# Altium PCB PCB1.PcbDoc
Units mil, origin at the board's own origin, x right, y up, seen from the top; angles counter-clockwise.
Board outline 6000 x 4000 mil, 2 copper layers (Top Layer, Bottom Layer); 35 components, 52 nets, 199 pads, 0 vias.
Unrouted connection lines stored in the file: 91.
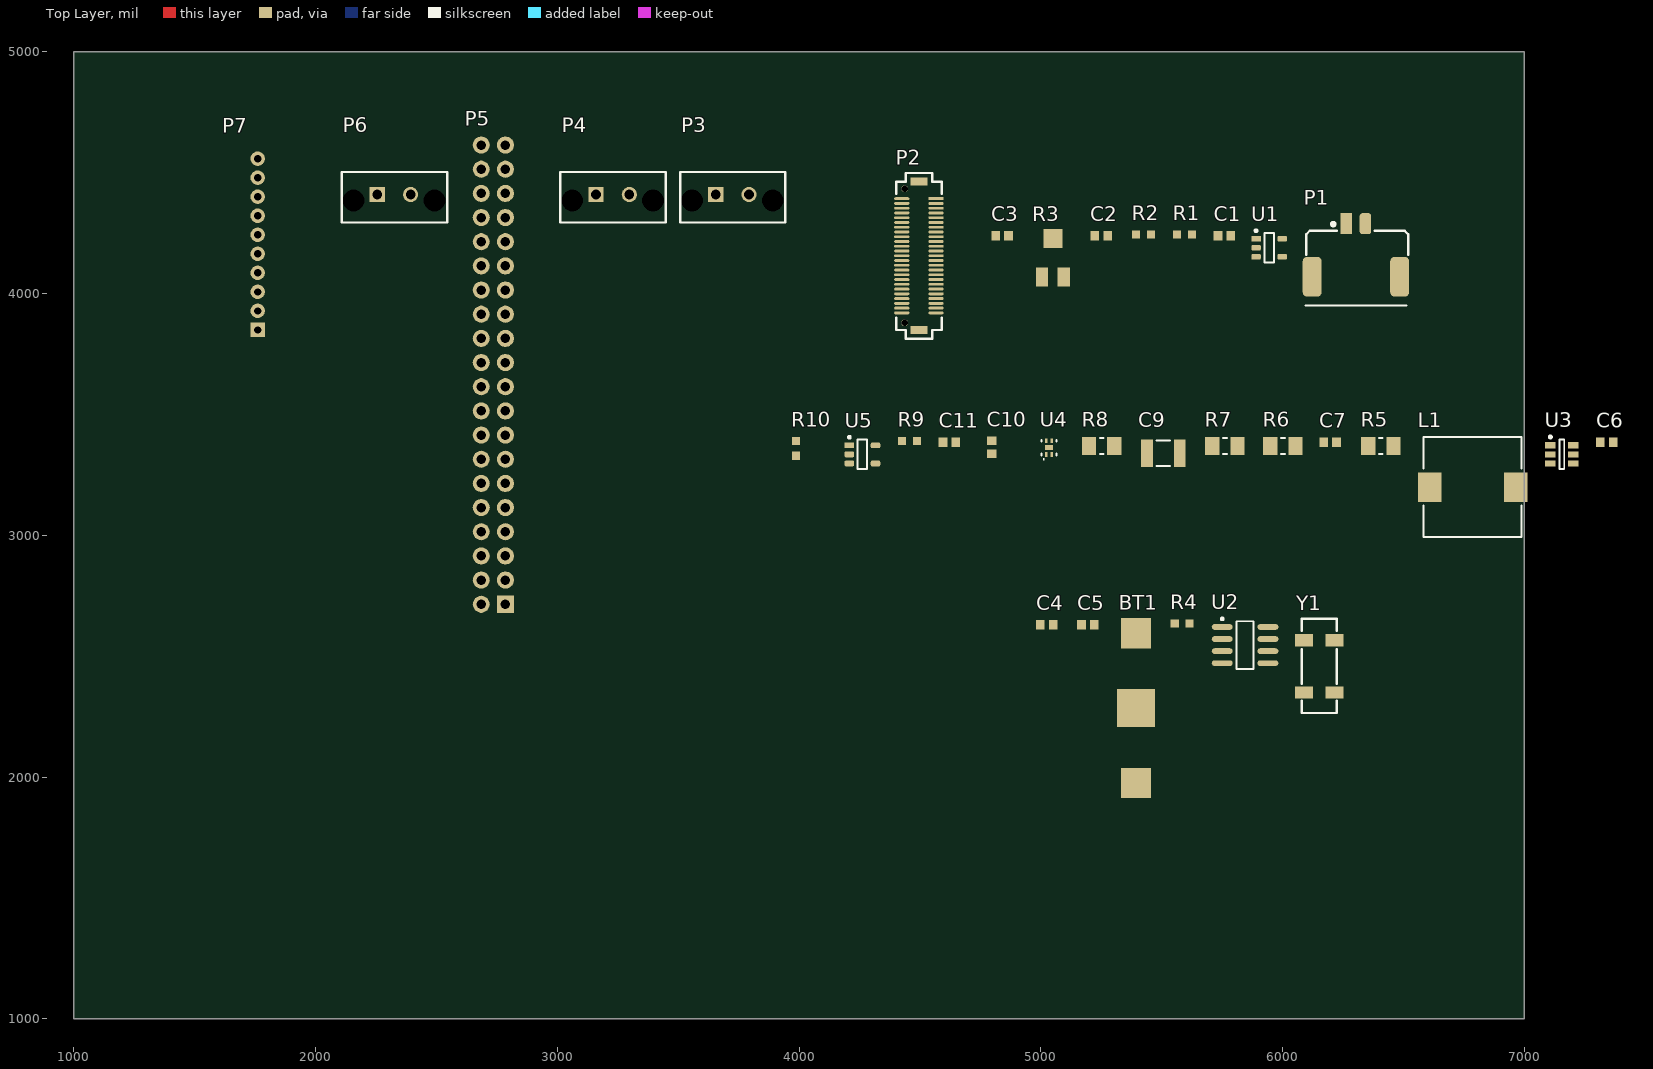
[diagram p0: Top Layer view]
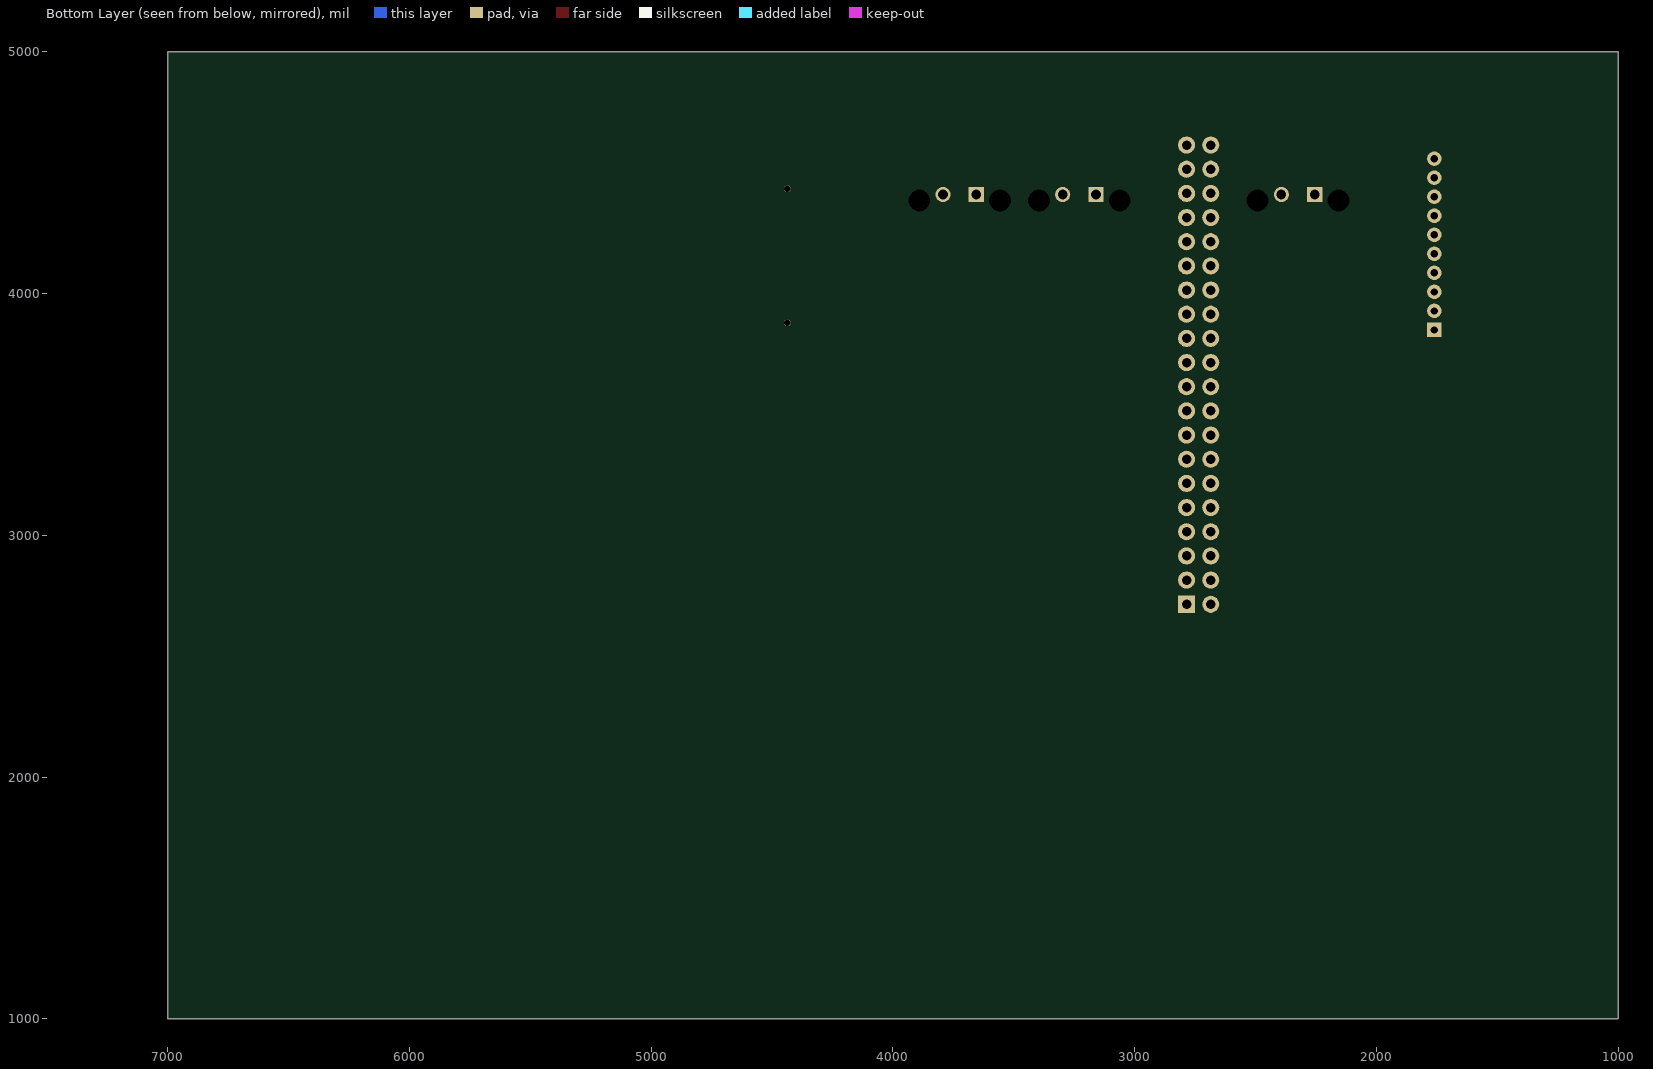
[diagram p1: Bottom Layer view, seen from below]

## Layer stack, top to bottom
Top Solder: solder mask 0.4, Solder Resist, Dk 3.5
Top Layer: signal copper 1.4
Dielectric 1: dielectric 12.6, FR-4, Dk 4.8
Bottom Layer: signal copper 1.4
Bottom Solder: solder mask 0.4, Solder Resist, Dk 3.5

## Board outline
1000,1000 7000,1000 7000,5000 1000,5000

## Design rules (kind name [scope] priority, off if disabled: settings)
Clearance [All] p1: gap=10 ignorepadtopadclearanceinfootprint=FALSE except(0: Arc-Hole Track-Hole SMDPad-Hole THPad-Hole Via-Hole Fill-Hole Poly-Hole Region-Hole Text-Hole)
PolygonConnect [All] p1: connectstyle=Relief reliefconductorwidth=10 reliefentries=4 polygonreliefangle="90 Angle" airgapwidth=10
RoomDefinition "Voltage Regulator" [InComponentClass('Voltage Regulator')] p1: confinementstyle=ConfineIn formatcopy=TRUE lockcomponents=FALSE outline 3952.09,2975 7417.09,2975 7417.09,3525 3952.09,3525
RoomDefinition "Raspberry pi connectors" [InComponentClass('Raspberry pi connectors')] p2: confinementstyle=ConfineIn formatcopy=TRUE lockcomponents=FALSE outline 1360,2600 3955,2600 3955,4870 1360,4870
RoomDefinition "Controller Board Interface" [InComponentClass('Controller Board Interface')] p3: confinementstyle=ConfineIn formatcopy=TRUE lockcomponents=FALSE outline 4365,3780 4595,3780 4595,4590 4365,4590
RoutingVias [All] p1: holewidth=28 width=50 viastyle="Through Hole" minholewidth=28 minwidth=50 maxholewidth=28 maxwidth=50
SolderMaskExpansion [All] p1: expansion=4
Width [All] p1: maxlimit=10 minlimit=10 preferedwidth=10
30 further rules are at their usual default settings.

## Classes and differential pairs
component class "Voltage Regulator": C6 C7 C8 C9 C10 C11 L1 R5 R6 R7 R8 R9 R10 U3 U4 U5
component class RTC: BT1 C4 C5 R4 U2 Y1
component class "Raspberry pi connectors": P3 P4 P5 P6 P7
component class "Controller Board Interface": P2
component class "Ambient Light Sensor": C1 C2 C3 P1 R1 R2 R3 U1

## Components (designator, comment, footprint, x,y, rotation, side; value= is the part's Value field where it differs from the comment)
BT1 "HOLDER COIN CELL FOR CR1220 SMD" "HOLDER BUTTON BATTERY 3V" 3845,3525 r90 top
C1 "CAP CER 1UF 50V 10% X7R 0603" "CAP, 0603" 5760,4240 r0 top
C2 "CAP CER 100PF 50V C0G/NP0 0603" "CAP, 0603" 5250,4240 r0 top
C3 "CAP CER 100PF 50V C0G/NP0 0603" "CAP, 0603" 4840,4240 r0 top
C4 "CAP CER 2.2UF 25V 10% X5R 0603" "CAP, 0603" 5025,2630 r0 top
C5 "CAP CER 1UF 50V 10% X7R 0603" "CAP, 0603" 5195,2630 r0 top
C6 "CAP CER 0.1UF 50V 10% X7R 0603" "CAP, 0603" 7342.09,3385 r0 top
C7 "CAP CER 680PF 25V C0G 0201" "CAP, 0603" 6197.09,3385 r0 top
C9 "CAP CER 22UF 16V ±20% X5R 1210" "CAP, 1210" 5507.09,3340 r0 top
C10 "CAP CER 1UF 50V 10% X7R 0603" "CAP, 0603" 4797.09,3365 r90 top
C11 "CAP CER 1UF 50V 10% X7R 0603" "CAP, 0603" 4622.09,3385 r0 top
L1 "IND 10UH 2.8A 59 MOHM SMD" "IND P100102X31N" 6787.09,3200 r0 top
P1 "Dura-Clik" "CONN, 2POS Dura-Click Vertical" 6264.53,4289.69 r0 top
P2 "CONN 50POS Bergstak Plug 0.02\"" "CONN, Bergstak 50 Pos Plug" 4495.87,4156.89 r0 top
P3 "CONN 2POS ULTRA-FIT 0.138\"" "CONN, 2POS ULTRA-FIT" 3655,4410 r0 top
P4 "CONN 2POS ULTRA-FIT NATURAL COLOR 0.138\"" "CONN, 2POS ULTRA-FIT - NATURAL COLOR" 3160,4410 r0 top
P5 "CONN 40POS RECEPTACLE 2.54 mm" "CONN 40POS RECEPTACLE 2.54 MM" 2785,2715 r90 top
P6 "CONN 2POS ULTRA-FIT NATURAL COLOR 0.138\"" "CONN, 2POS ULTRA-FIT - NATURAL COLOR" 2255,4410 r0 top
P7 "CONN 10POS HEADER PH SIDE 2MM" "CONN 10 POS" 1760,3850 r90 top
R1 "RES 120 OHM 1% 1/10W 0603" "RES, 0603" 5595,4245 r0 top
R2 "RES 4.7K OHM 1% 1/10W 0603" "RES, 0603" 5425,4245 r0 top
R3 "POT 100K OHM 0.25W SMD" "POT TRIMMER 100K SMD" 5005,4070 r0 top
R4 "1K" "RES, 0603" 5585,2635 r0 top
R5 "RES 499K OHM 1% 1/4W 1206" "RES 1206" 6407.09,3370 r0 top
R6 "ES 100K OHM 1% 1/4W 1206" "RES 1206" 6002.09,3370 r0 top
R7 "RES 2.49 OHM 1% 1/4W 1206" "RES 1206" 5762.09,3370 r0 top
R8 "RES 13.7K OHM 1% 1/4W 1206" "RES 1206" 5252.09,3370 r0 top
R9 "RES 10K OHM 1% 1/10W 0603" "RES, 0603" 4457.09,3390 r0 top
R10 "RES 10K OHM 1% 1/10W 0603" "RES, 0603" 3987.09,3360 r90 top
U1 "IC OP AMP GEN PURPOSE RR 10MHZ SOT-23-5" "IC OP AMP GP RR 10MHZ SOT-23-5" 5945,4190 r0 top
U2 "IC RTC CLK/CALENDAR I2C 8-SOIC" SOIC8 5845,2545 r0 top
U3 "IC REG BUCK ADJ 2A SYNC 6SOT" SOT23-6 7157.09,3335 r0 top
U4 "IC REG LDO 3V 0.2A 4-TDFN" "IC REG LDO 3V 0.2A 4-TDFN" 5022.09,3335 r0 top
U5 "IC OP AMP GEN PURPOSE RR 10MHZ SOT-23-5" "IC OP AMP GP RR 10MHZ SOT-23-5" 4262.09,3335 r0 top
Y1 "CRYSTAL 32.7680KHZ 12.5PF SMD" 4-SOJ 6215,2350 r90 top

## Footprints (in the part's own frame and the unit in brackets; to place one, negate y for a bottom-side part, rotate by r counter-clockwise, add the part's x,y. Pads: shape width x height; smd on the part's side, far side on the other; paste and mask are expansions set on the pad)
4-SOJ [mm]
  rect 1.3x1.9 smd: 1(0,0) 2(5.5,0) 3(5.5,3.2) 4(0,3.2)
  silkscreen extent -2.16,-0.25 7.75,3.43
"CAP, 0603" [mm] "Chip Capacitor, 2-Leads, Body 1.60x0.81mm, IPC Medium Density"
  rect 0.9x1 smd mask+0.076: 1(-0.675,0) 2(0.675,0)
  body extent -0.87,-0.48 0.87,0.48, height 0.9
"CAP, 1210" [mm] "Chip Capacitor, 2-Leads, Body 3.20x2.50mm, IPC Low Density"
  rect 1.25x2.9 smd: 1(-1.725,0) 2(1.725,0)
  silkscreen extent -0.7,-1.35 0.7,1.35, body extent -1.8,-1.4 1.8,1.4, height 2.8
"CONN 10 POS" [mil]
  rect 60x60 hole 30: 1(0,0)
  round 60 hole 30: 2(78.74,0) 3(157.48,0) 4(236.22,0) 5(314.96,0) 6(393.7,0) 7(629.92,0) 8(551.18,0) 9(472.44,0) 10(708.66,0)
  body extent -77,-294 785,157, height 229
"CONN 40POS RECEPTACLE 2.54 MM" [mm] "gpio header for raspberry pi"
  rect 1.8x1.8 hole 1: 1(0,0)
  round 1.8 hole 1: 2(0,2.54) 3(2.54,0) 4(2.54,2.54) 5(5.08,0) 6(5.08,2.54) 7(7.62,0) 8(7.62,2.54) 9(10.16,0) 10(10.16,2.54) 11(12.7,0) 12(12.7,2.54) 13(15.24,0) 14(15.24,2.54) 15(17.78,0) 16(17.78,2.54) 17(20.32,0) 18(20.32,2.54) 19(22.86,0) 20(22.86,2.54) 21(25.4,0) 22(25.4,2.54) 23(27.94,0) 24(27.94,2.54) 25(30.48,0) 26(30.48,2.54) 27(33.02,0) 28(33.02,2.54) 29(35.56,0) 30(35.56,2.54) 31(38.1,0) 32(38.1,2.54) 33(40.64,0) 34(40.64,2.54) 35(43.18,0) 36(43.18,2.54) 37(45.72,0) 38(45.72,2.54) 39(48.26,0) 40(48.26,2.54)
  body extent -2.02,-4.55 49.55,4.52, height 9.48
"CONN, 2POS Dura-Click Vertical" [mm] "WM7169CT-ND"
  rect 1.2x2.2 smd: 1(0,0)
  rrect50% 1.2x2.2 smd: 2(2,0)
  rrect50% 2x4.2 smd: 3(-3.6,-5.58) 3(5.6,-5.58)
  silkscreen extent -4.28,-8.6 6.5,0.05, body extent -4.45,-8.63 6.45,0.52, height 8
"CONN, 2POS ULTRA-FIT" [mm] "2 Positions Header, Shrouded Connector 0.138\" (3.50mm) Through Hole Gold"
  rect 1.6x1.6 hole 1.02: 1(0,0)
  round 1.6 hole 1.02: 2(3.5,0)
  round 1.6 hole 2.3: ""(-2.5,-0.63) ""(6,-0.63)
  silkscreen extent -3.74,-2.93 7.33,2.37, body extent -3.48,-2.87 7.12,5.79, height 13.85
"CONN, 2POS ULTRA-FIT - NATURAL COLOR" [mm] "2 Positions Header, Shrouded Connector 0.138\" (3.50mm) Through Hole Gold"
  rect 1.6x1.6 hole 1.02: 1(0,0)
  round 1.6 hole 1.02: 2(3.5,0)
  round 1.6 hole 2.3: ""(-2.5,-0.63) ""(6,-0.63)
  silkscreen extent -3.74,-2.93 7.33,2.37, body extent -3.48,-2.87 7.12,5.79, height 13.85
"CONN, Bergstak 50 Pos Plug" [mm] "Bergstak 50 Position Plug"
  rect 1.6x0.3 smd: 1(1.8,6)
  oval 1.6x0.3 smd: 2(1.8,5.5) 3(1.8,5) 4(1.8,4.5) 5(1.8,4) 6(1.8,3.5) 7(1.8,3) 8(1.8,2.5) 9(1.8,2) 10(1.8,1.5) 11(1.8,1) 12(1.8,0.5) 13(1.8,0) 14(1.8,-0.5) 15(1.8,-1) 16(1.8,-1.5) 17(1.8,-2) 18(1.8,-2.5) 19(1.8,-3) 20(1.8,-3.5) 21(1.8,-4) 22(1.8,-4.5) 23(1.8,-5) 24(1.8,-5.5) 25(1.8,-6) 26(-1.8,-6) 27(-1.8,-5.5) 28(-1.8,-5) 29(-1.8,-4.5) 30(-1.8,-4) 31(-1.8,-3.5) 32(-1.8,-3) 33(-1.8,-2.5) 34(-1.8,-2) 35(-1.8,-1.5) 36(-1.8,-1) 37(-1.8,-0.5) 38(-1.8,0) 39(-1.8,0.5) 40(-1.8,1) 41(-1.8,1.5) 42(-1.8,2) 43(-1.8,2.5) 44(-1.8,3) 45(-1.8,3.5) 46(-1.8,4) 47(-1.8,4.5) 48(-1.8,5) 49(-1.8,5.5) 50(-1.8,6)
  round 0.7 hole 0.7: ""(-1.5,-7.05) ""(-1.5,7.05)
  rect 1.8x0.8 smd: ""(0,-7.8) ""(0,7.8)
  silkscreen extent -2.4,-8.7 2.4,8.7, body extent -2.3,-7.75 2.3,7.75, height 4.2
"HOLDER BUTTON BATTERY 3V" [mm]
  rect 3.18x3.18 smd: 1(-39.35,-39.35) 3(-23.61,-39.35)
  rect 3.96x3.96 smd: 2(-31.48,-39.35)
"IC OP AMP GP RR 10MHZ SOT-23-5" [mm] "SOT23, 5-Leads, Body 2.90x2.80mm, Pitch 0.95mm, IPC Medium Density"
  rect 1x0.6 smd: 1(-1.375,0.95)
  rrect50% 1x0.6 smd: 2(-1.375,0) 3(-1.375,-0.95) 4(1.375,-0.95) 5(1.375,0.95)
  silkscreen extent -1.5,-1.55 0.5,1.92, body extent -1.5,-1.53 1.5,1.53, height 1.45
"IC REG LDO 3V 0.2A 4-TDFN" [mm] "QFN, 4-Leads, Body 1.20x1.60mm, Pitch 0.50mm/1.40mm, Thermal Pad 0.86x0.50mm, IPC Medium Density"
  rect 0.25x0.5 smd: 1(0,0) 2(0.6,0) 3(0.6,1.44) 4(0,1.44)
  rect 0.86x0.5 smd: 5(0.3,0.715)
  silkscreen extent -0.48,-0.56 1.07,1.54, body extent -0.33,-0.11 0.92,1.54, height 0.6
"IND P100102X31N" [mm] "Precision Wire Wound Inductor, 2-Leads, Body 10.00x10.20mm, IPC Medium Density"
  rect 2.45x3.1 smd: 1(-4.525,0) 2(4.525,0)
  silkscreen extent -5.15,-5.25 5.15,5.25, body extent -5.15,-5.25 5.15,5.25, height 3.1
"POT TRIMMER 100K SMD" [mm] "TRIMMER 100K OHM 0.25W SMD"
  rect 1.3x2 smd: 1(0,0) 2(2.3,0)
  rect 2x2 smd: 3(1.15,4)
  body extent -1.25,-0.4 3.55,4.6, height 3.75
"RES 1206" [mm] "Chip Resistor, 2-Leads, Body 3.20x1.60mm, IPC Medium Density"
  rect 1.5x1.85 smd: 1(-1.325,0) 2(1.325,0)
  silkscreen extent -0.2,-0.82 0.2,0.82, body extent -1.73,-0.92 1.73,0.92, height 0.64
"RES, 0603" [mm] "Chip Resistor, 2-Leads, Body 1.60x0.80mm, IPC Medium Density"
  rect 0.85x0.85 smd: 1(-0.775,0) 2(0.775,0)
  body extent -0.8,-0.4 0.8,0.4, height 0.55
SOIC8 [mm]
  oval 2.2x0.6 smd: 1(-2.394,1.935) 2(-2.394,0.665) 3(-2.394,-0.605) 4(-2.394,-1.875) 5(2.406,-1.875) 6(2.406,-0.605) 7(2.406,0.665) 8(2.406,1.935)
  silkscreen extent -2.52,-2.47 0.91,2.91, body extent -1.99,-2.47 2.01,2.53, height 1.75
SOT23-6 [mm]
  rect 1.1x0.65 smd: 1(-1.229,0.955) 2(-1.229,0.005) 3(-1.229,-0.945) 4(1.171,-0.945) 5(1.171,0.005) 6(1.171,0.955)
  silkscreen extent -1.35,-1.54 0.22,1.95, body extent -0.93,-1.54 0.87,1.56, height 1.45

## Part data
BT1: "Coin cell holder", Case/Package=SMD/SMT, Manufacturer="Memory Protection Devices", Manufacturer Part Number=BC501SM-TR, Max Operating Temperature=85°C, Min Operating Temperature=-40°C, Package Quantity=500, Body Material=Bronze, ComponentLink1Description=https://datasheet.ciiva.com/4/bc501sm-tr-datasheet-4384.pdf, ComponentLink1URL=https://datasheet.ciiva.com/4/bc501sm-tr-datasheet-4384.pdf, ComponentLink2Description=https://datasheet.ciiva.com/3/3000-3953.pdf, ComponentLink2URL=https://datasheet.ciiva.com/3/3000-3953.pdf, ComponentLink3Description=https://datasheet.ciiva.com/11714/0900766b8002ef78-11714721.pdf, ComponentLink3URL=https://datasheet.ciiva.com/11714/0900766b8002ef78-11714721.pdf, ComponentLink4Description=https://datasheet.ciiva.com/20221/18-3570e-20221596.pdf, ComponentLink4URL=https://datasheet.ciiva.com/20221/18-3570e-20221596.pdf, ComponentLink5Description=https://datasheet.ciiva.com/1391/1718262-1391630.pdf, ComponentLink5URL=https://datasheet.ciiva.com/1391/1718262-1391630.pdf, Contact Material=Bronze,Nickel, Contact Plating=Nickel, Diameter=12mm, Height=3.17mm, Lead Free="Lead Free", Material=Bronze, Mount="Surface Mount,PCB", Number of Batteries=1, Number of Cells=1, Packaging=Bulk, Pricing 1="1=1.26, 10=1.166, 100=1.1029 (USD)", Pricing 2="1=0.58, 10=0.545, 50=0.4356, 100=0.4175, 250=0.3812, 500=0.363, 1000=0.305, 2500=0.2723, 5000=0.2632 (USD)", REACH SVHC="No SVHC", Stock 1=21261, Stock 2=19094, Supplier 1=Digi-Key, Supplier 2=Digi-Key, Supplier Part Number 2=36-3000-ND, Termination=SMD/SMT
C1 C5 C10 C11: "1µF ±10% 50V Ceramic Capacitor X7R 0603 (1608 Metric)", Capacitance=1µF, Manufacturer 1="Taiyo Yuden", Manufacturer Part Number 1=UMK107AB7105KA-T, Operating Temperature="-55°C ~ 125°C", Package / Case="0603 (1608 Metric)", Ratings=-, Supplier Part Number 1=587-3247-1-ND, Temperature Coefficient=X7R, Tolerance=±10%, Voltage=50V, ComponentLink1Description=http://www.yuden.co.jp/productdata/catalog/en/mlcc_all_e.pdf, ComponentLink1URL=http://www.yuden.co.jp/productdata/catalog/en/mlcc_all_e.pdf, Height - Seated (Max)=-, Lead Spacing=-, Lead Style=-, Mounting Type="Surface Mount, MLCC", Packaging="Cut Tape (CT)", Part Status=Active, Size / Dimension="0.063\" L x 0.031\" W (1.60mm x 0.80mm)", Supplier 1=Digi-Key, Thickness (Max)="0.037\" (0.95mm)"
C2 C3: "100pF ±1% 50V Ceramic Capacitor C0G, NP0 0603 (1608 Metric)", Capacitance=100pF, Case/Package=0603, Case Code (Metric)=1608, Dielectric=C0G, Manufacturer="Kyocera AVX", Manufacturer Part Number=06035A101FAT2A, Max Operating Temperature=125°C, Min Operating Temperature=-55°C, Package Quantity=1, Supplier Part Number 1=478-6202-1-ND, Tolerance=1%, Voltage=50V, Case Code (Imperial)=0603, ComponentLink1Description=https://datasheet.ciiva.com/22682/1796416-22682854.pdf, ComponentLink1URL=https://datasheet.ciiva.com/22682/1796416-22682854.pdf, ComponentLink2Description=https://datasheet.ciiva.com/150/ccog-150746.pdf, ComponentLink2URL=https://datasheet.ciiva.com/150/ccog-150746.pdf, ComponentLink3Description=https://datasheet.ciiva.com/150/ccog-150747.pdf, ComponentLink3URL=https://datasheet.ciiva.com/150/ccog-150747.pdf, ComponentLink4Description=https://datasheet.ciiva.com/150/ccog-150748.pdf, ComponentLink4URL=https://datasheet.ciiva.com/150/ccog-150748.pdf, ComponentLink5Description=https://datasheet.ciiva.com/28585/1796416-28585980.pdf, ComponentLink5URL=https://datasheet.ciiva.com/28585/1796416-28585980.pdf, ComponentLink6Description=https://datasheet.ciiva.com/16300/ccog-16300413.pdf, ComponentLink6URL=https://datasheet.ciiva.com/16300/ccog-16300413.pdf, ComponentLink7Description=https://datasheet.ciiva.com/17492/ccog-17492189.pdf, ComponentLink7URL=https://datasheet.ciiva.com/17492/ccog-17492189.pdf, Depth=0.81mm, Height=0.86mm, Lead Free="Lead Free", Length=1.6mm, Mount="Surface Mount", Packaging="Tape and Reel", Pricing 1="1=0.24, 10=0.161, 100=0.0814, 500=0.0557, 1000=0.0493 (USD)", Radiation Hardening=No, REACH SVHC="No SVHC", Stock 1=176069, Supplier 1=Digi-Key, Termination=SMD/SMT, Thickness=0.035inch, Voltage Rating=50V, Voltage Rating (DC)=50V, Width=0.81mm
C4: "2.2µF ±10% 25V Ceramic Capacitor X5R 0603 (1608 Metric)", Capacitance=2.2µF, Manufacturer 1="Murata Electronics North America", Manufacturer Part Number 1=GRM188R61E225KA12D, Operating Temperature="-55°C ~ 85°C", Package / Case="0603 (1608 Metric)", Ratings=-, Supplier Part Number 1=490-10731-1-ND, Temperature Coefficient=X5R, Tolerance=±10%, Voltage=25V, ComponentLink1Description=http://www.murata.com/~/media/webrenewal/support/library/catalog/products/capacitor/mlcc/c02e.ashx, ComponentLink1URL=http://www.murata.com/~/media/webrenewal/support/library/catalog/products/capacitor/mlcc/c02e.ashx, Height - Seated (Max)=-, Lead Spacing=-, Lead Style=-, Mounting Type="Surface Mount, MLCC", Packaging="Cut Tape (CT)", Part Status=Active, Size / Dimension="0.063\" L x 0.031\" W (1.60mm x 0.80mm)", Supplier 1=Digi-Key, Thickness (Max)="0.035\" (0.90mm)"
C6: "0.10µF ±10% 50V Ceramic Capacitor X7R 0603 (1608 Metric)", Capacitance=0.1µF, Manufacturer 1="AVX Corporation", Manufacturer Part Number 1=06035C104KAT2A, Operating Temperature="-55°C ~ 125°C", Package / Case="0603 (1608 Metric)", Ratings=-, Supplier Part Number 1=478-5052-1-ND, Temperature Coefficient=X7R, Tolerance=±10%, Voltage=50V, ComponentLink1Description=http://datasheets.avx.com/X7RDielectric.pdf, ComponentLink1URL=http://datasheets.avx.com/X7RDielectric.pdf, Height - Seated (Max)=-, Lead Spacing=-, Lead Style=-, Mounting Type="Surface Mount, MLCC", Packaging="Cut Tape (CT)", Part Status=Active, Size / Dimension="0.063\" L x 0.032\" W (1.60mm x 0.81mm)", Supplier 1=Digi-Key, Thickness (Max)="0.035\" (0.90mm)"
C7: "680pF ±5% 25V Ceramic Capacitor C0G, NP0 0201 (0603 Metric)", Capacitance=680pF, Dielectric=C0G, Manufacturer=Murata, Manufacturer Part Number=GRM0335C1E681JA01D, Supplier Part Number 1=490-14330-1-ND, Tolerance=5%, Voltage Rating (DC)=25V, Length=600um, Pricing 1="1=0.1, 10=0.017, 100=0.0078, 500=0.0056, 1000=0.0044, 2500=0.004, 5000=0.0037 (USD)", Stock 1=66100, Supplier 1=Digi-Key, Thickness=300um, Width=300um
C9: "22µF ±20% 16V Ceramic Capacitor X5R 1210 (3225 Metric)", Capacitance=22µF, Manufacturer 1="Murata Electronics North America", Manufacturer Part Number 1=GRM32ER61C226ME20L, Operating Temperature="-55°C ~ 85°C", Package / Case="1210 (3225 Metric)", Ratings=-, Supplier Part Number 1=490-1881-1-ND, Temperature Coefficient=X5R, Tolerance=±20%, Voltage=16V, ComponentLink1Description=http://www.murata.com/~/media/webrenewal/support/library/catalog/products/capacitor/mlcc/c02e.ashx, ComponentLink1URL=http://www.murata.com/~/media/webrenewal/support/library/catalog/products/capacitor/mlcc/c02e.ashx, Height - Seated (Max)=-, Lead Spacing=-, Lead Style=-, Mounting Type="Surface Mount, MLCC", Packaging="Cut Tape (CT)", Part Status=Active, Size / Dimension="0.126\" L x 0.098\" W (3.20mm x 2.50mm)", Supplier 1=Digi-Key, Thickness (Max)="0.106\" (2.70mm)"
L1: "10µH Shielded Inductor 2.8A 59 mOhm Max Nonstandard", Case/Package=Nonstandard, Current Rating=2.8A, DC Resistance (DCR)=59mR, Inductance=10uh, Manufacturer=Sumida, Manufacturer Part Number=CDRH103RNP-100NC-B, Max Operating Temperature=100°C, Min Operating Temperature=-40°C, Package Quantity=1000, Saturation Current=3.18A, Supplier Part Number 1=308-1910-1-ND, Test Frequency=100kHz, Tolerance=30%, ComponentLink1Description=http://www.mouser.com/ds/2/390/CDRH103R-523372.pdf, ComponentLink1URL=http://www.mouser.com/ds/2/390/CDRH103R-523372.pdf, ComponentLink2Description=http://www.sumida.com/products/pdf/CDRH103R.pdf, ComponentLink2URL=http://www.sumida.com/products/pdf/CDRH103R.pdf, ComponentLink3Description=http://products.sumida.com/products/pdf/CDRH103R.pdf, ComponentLink3URL=http://products.sumida.com/products/pdf/CDRH103R.pdf, Core Material=Ferrite, Depth=10.3mm, Height=3.1mm, Height - Seated (Max)=0.122inch, Lead Free="Lead Free", Length=0.402inch, Max DC Current=2.8A, Mount="Surface Mount", Packaging="Tape and Reel", Pricing 1="1=1.53, 10=1.42, 100=1.027, 500=0.7866 (USD)", Radiation Hardening=No, Shielding=Shielded, Stock 1=69, Supplier 1=Digi-Key, Termination=SMD/SMT, Width=0.394inch
P1: library part "CONN 2POS DURA-CLIK 0.079\" VERT", "2 Positions Header, Shrouded Connector 0.079\" (2.00mm) Surface Mount, Vertical Tin", Current Rating=-, Insulation Color=Natural, Manufacturer="Molex, LLC", Manufacturer Part Number=5600200220, Supplier Part Number 1=WM10862CT-ND, Applications="Automotive, Industrial", Category="Connectors, Interconnects", ComponentLink1Description=http://www.molex.com/pdm_docs/sd/5600200220_sd.pdf, ComponentLink1URL=http://www.molex.com/pdm_docs/sd/5600200220_sd.pdf, Connector Type=Header, Contact Finish - Mating=Tin, Contact Finish - Post=Tin, Contact Finish Thickness - Mating=-, Contact Finish Thickness - Post=-, Contact Length - Mating=-, Contact Length - Post=-, Contact Material="Copper Alloy", Contact Shape=Square, Contact Type="Male Pin", Fastening Type="Latch Lock", Features="Solder Retention", Ingress Protection=-, Insulation Height="0.315\" (8.00mm)", Insulation Material="Polyamide (PA), Nylon", Mated Stacking Heights=9.3mm, Material Flammability Rating=-, Mounting Type="Surface Mount", Number of Positions=2, Number of Positions Loaded=All, Number of Rows=1, Operating Temperature=-, Overall Contact Length=-, Packaging="Cut Tape (CT)", Part Status=Active, Pitch - Mating="0.079\" (2.00mm)", Pricing 1="1=1.16, 10=1.012, 25=0.952, 50=0.9122, 100=0.8727, 250=0.79336 (CAD)", RoHS="RoHS Compliant", Row Spacing - Mating=-, Shrouding="Shrouded - 4 Wall", Stock 1=11912, Style="Board to Cable/Wire", Supplier 1=Digi-Key, Termination=Solder, Voltage Rating=-
P2: "50 Position Connector Plug, Outer Shroud Contacts Surface Mount Gold", Manufacturer 1="Amphenol FCI", Manufacturer Part Number 1=10132797-055100LF, Supplier Part Number 1=609-5226-1-ND, ComponentLink1Description=http://portal.fciconnect.com/Comergent//fci/drawing/10132797.pdf, ComponentLink1URL=http://portal.fciconnect.com/Comergent//fci/drawing/10132797.pdf, Connector Type="Plug, Outer Shroud Contacts", Contact Finish=Gold, Contact Finish Thickness="1µin (0.025µm)", Height Above Board="0.169\" (4.30mm)", Mated Stacking Heights=5mm, Mounting Type="Surface Mount", Number of Positions=50, Number of Rows=2, Packaging="Cut Tape (CT)", Part Status=Active, Pitch="0.020\" (0.50mm)", Series="BergStak Plug", Supplier 1=Digi-Key
P3: "2 Positions Header, Shrouded Connector 0.138\" (3.50mm) Through Hole Gold", Current Rating=-, Insulation Color=Black, Manufacturer 1="Molex, LLC", Manufacturer Part Number 1=1722861302, Material Flammability Rating="UL94 V-0", Operating Temperature="-40°C ~ 120°C", Supplier Part Number 1=WM11673-ND, Voltage=400V, ComponentLink1Description=http://www.molex.com/pdm_docs/sd/1722861302_sd.pdf, ComponentLink1URL=http://www.molex.com/pdm_docs/sd/1722861302_sd.pdf, Connector Type=Header, Contact Finish - Mating=Gold, Contact Finish - Post=Tin, Contact Finish Thickness - Mating="30µin (0.76µm)", Contact Finish Thickness - Post="60µin (1.52µm)", Contact Length - Mating=-, Contact Length - Post="0.126\" (3.20mm)", Contact Material="Copper Alloy", Contact Shape=Square, Contact Type="Male Pin", Fastening Type="Latch Holder", Ingress Protection=-, Insulation Height="0.465\" (11.80mm)", Insulation Material="Liquid Crystal Polymer (LCP)", Mated Stacking Heights=26.99mm, Mounting Type="Through Hole", Number of Positions=2, Number of Positions Loaded=All, Number of Rows=1, Overall Contact Length=-, Packaging=Tray, Part Status=Active, Pitch - Mating="0.138\" (3.50mm)", Row Spacing - Mating=-, Series=UltraFit, Shrouding="Shrouded - 4 Wall", Style="Board to Board or Cable", Supplier 1=Digi-Key, Termination="Kinked Pin, Solder"
P4 P6: "2 Positions Header, Shrouded Connector 0.138\" (3.50mm) Through Hole", Color=White, Current Rating=-, Insulation Color=Natural, Manufacturer 1="Molex, LLC", Manufacturer Part Number 1=1722872102, Material Flammability Rating="UL94 V-0", Operating Temperature="-40°C ~ 105°C", Supplier Part Number 1=WM11722-ND, Voltage=400V, ComponentLink1Description=http://www.molex.com/pdm_docs/sd/1722872102_sd.pdf, ComponentLink1URL=http://www.molex.com/pdm_docs/sd/1722872102_sd.pdf, Connector Type=Header, Contact Finish - Mating=Tin, Contact Finish - Post=Tin, Contact Finish Thickness - Mating="60µin (1.52µm)", Contact Finish Thickness - Post="60µin (1.52µm)", Contact Length - Mating=-, Contact Length - Post="0.126\" (3.20mm)", Contact Material="Copper Alloy", Contact Shape=Square, Contact Type="Male Pin", Fastening Type="Latch Holder", Ingress Protection=-, Insulation Height="0.465\" (11.80mm)", Insulation Material="Liquid Crystal Polymer (LCP)", Mated Stacking Heights=26.99mm, Mounting Type="Through Hole", Number of Positions=2, Number of Positions Loaded=All, Number of Rows=1, Overall Contact Length=-, Packaging=Tray, Part Status=Active, Pitch - Mating="0.138\" (3.50mm)", Row Spacing - Mating=-, Series=UltraFit, Shrouding="Shrouded - 4 Wall", Style="Board to Cable/Wire", Supplier 1=Digi-Key, Termination=Solder
P5: "GPIO HEADER FOR RASPBERRYPI A+/B", Manufacturer="Adafruit Industries", Manufacturer Part Number=1992, Supplier Part Number 1=1528-1969-ND, ComponentLink1Description="gpio header raspberry pi", ComponentLink1URL=https://www.digikey.ca/product-detail/en/adafruit-industries-llc/1992/1528-1969-ND/6827092, Pricing 1="1=2.95 (USD)", Stock 1=175, Supplier 1=Digi-Key
P7: "10 Positions Header Connector 0.079\" (2.00mm) Through Hole, Right Angle Tin", Colour=Natural, Contact Resistance=20mR, Current Rating=2A, Housing Colour=White, Manufacturer=JST, Manufacturer Part Number=S10B-PH-K-S(LF)(SN), Max Operating Temperature=85°C, Max Voltage Rating (AC)=100V, Min Operating Temperature=-25°C, Supplier Part Number 1=455-1727-ND, ComponentLink1Description=https://datasheet.ciiva.com/712/eph-712647.pdf, ComponentLink1URL=https://datasheet.ciiva.com/712/eph-712647.pdf, ComponentLink2Description=https://datasheet.ciiva.com/16484/s10b-ph-k-slfsn-16484152.pdf, ComponentLink2URL=https://datasheet.ciiva.com/16484/s10b-ph-k-slfsn-16484152.pdf, ComponentLink3Description=https://datasheet.ciiva.com/11747/0900766b8082f55e-11747839.pdf, ComponentLink3URL=https://datasheet.ciiva.com/11747/0900766b8082f55e-11747839.pdf, Connector Type="Male Pin", Contact Material=Brass,Tin, Contact Mating Length=0.13inch, Contact Plating=Copper,Tin, Depth=7.6mm, Fastening Type=Detent, Gender=Male, Height=9.4mm, Housing Material=Polyamide, Lead Free="Lead Free", Length=21.9mm, Max Current Rating=2A, Mount="Through Hole", Number of Contacts=10, Number of Pins=10, Number of Positions=10, Number of Rows=1, Orientation="Right Angle", Packaging=Bulk, Pitch=2mm, Pricing 1="1=0.49, 10=0.459, 100=0.3216, 500=0.27564, 1000=0.22971, 5000=0.19689, 10000=0.18377 (USD)", Stock 1=2365, Supplier 1=Digi-Key, Termination=Solder, Voltage Rating=100V, Width=4.5mm
R1: "RES SMD 120 OHM 1% 1/10W 0603", Manufacturer 1=Yageo, Manufacturer Part Number 1=RC0603FR-07120RL, Operating Temperature="-55°C ~ 155°C", Package / Case="0603 (1608 Metric)", Power=1/10W, Resistance="120 Ohm", Supplier Device Package=0603, Supplier Part Number 1=311-120HRCT-ND, Temperature Coefficient=±100ppm/°C, Tolerance=±1%, ComponentLink1Description=http://www.yageo.com/documents/recent/PYu-RC_Group_51_RoHS_L_7.pdf, ComponentLink1URL=http://www.yageo.com/documents/recent/PYu-RC_Group_51_RoHS_L_7.pdf, Composition="Thick Film", Failure Rate=-, Height - Seated (Max)="0.022\" (0.55mm)", Packaging="Cut Tape (CT)", Part Status=Active, Size / Dimension="0.063\" L x 0.031\" W (1.60mm x 0.80mm)", Supplier 1=Digi-Key
R2: "4.7k Ohm ±1% 0.1W, 1/10W Chip Resistor 0603 (1608 Metric) Moisture Resistant Thick Film", Manufacturer 1=Yageo, Manufacturer Part Number 1=RC0603FR-074K7L, Operating Temperature="-55°C ~ 155°C", Package / Case="0603 (1608 Metric)", Power (Watts)=1/10W, Resistance (Ohms)=4.7k, Supplier Device Package=0603, Supplier Part Number 1=311-4.70KHRCT-ND, Temperature Coefficient=±100ppm/°C, Tolerance=±1%, Category=Resistors, ComponentLink1Description=http://www.yageo.com/documents/recent/PYu-RC_Group_51_RoHS_L_7.pdf, ComponentLink1URL=http://www.yageo.com/documents/recent/PYu-RC_Group_51_RoHS_L_7.pdf, Composition="Thick Film", Description 1="RES SMD 4.7K OHM 1% 1/10W 0603", Failure Rate=-, Features="Moisture Resistant", Height - Seated (Max)="0.022\" (0.55mm)", Packaging="Cut Tape (CT)", Part Status=Active, Pricing 1="1=0.16, 10=0.022, 100=0.0089, 1000=0.00402, 2500=0.00349 (CAD)", RoHS="RoHS Compliant", Size / Dimension="0.063\" L x 0.031\" W (1.60mm x 0.80mm)", Stock 1=3487566, Supplier 1=Digi-Key
R3: "100 kOhms 0.25W, 1/4W J Lead Surface Mount Trimmer Potentiometer Cermet 11 Turn Side Adjustment", Manufacturer="Nidec Copal", Manufacturer Part Number=SM-42TA104, Max Operating Temperature=150°C, Max Power Dissipation=1/4W, Min Operating Temperature=-65°C, Package Quantity=1, Resistance=100kR, Supplier Part Number 1=SM-42TA104CT-ND, Temperature Coefficient=100ppm/°C, Tolerance=10%, ComponentLink1Description=https://datasheet.ciiva.com/2156/sm-42sm-43-2156561.pdf, ComponentLink1URL=https://datasheet.ciiva.com/2156/sm-42sm-43-2156561.pdf, ComponentLink2Description=https://datasheet.ciiva.com/2156/sm-42sm-43-2156562.pdf, ComponentLink2URL=https://datasheet.ciiva.com/2156/sm-42sm-43-2156562.pdf, ComponentLink3Description=https://datasheet.ciiva.com/2156/sm-42sm-43-2156563.pdf, ComponentLink3URL=https://datasheet.ciiva.com/2156/sm-42sm-43-2156563.pdf, Composition=Cermet, Height=0.146inch, Length=0.189inch, Mount="Surface Mount", Number of Turns=11, Packaging="Tape and Reel", Pricing 1="1=3.4, 10=2.979, 25=2.66, 50=2.5004, 100=2.4472, 250=2.3408 (USD)", Radiation Hardening=No, Stock 1=3997, Supplier 1=Digi-Key, Width=0.181inch
R4: library part "RES 1K OHM 5% 1/10W 0603", "1k Ohm ±5% 0.1W, 1/10W Chip Resistor 0603 (1608 Metric)", Manufacturer=Yageo, Manufacturer Part Number=RC0603JR-071KL, Operating Temperature="-55°C ~ 155°C", Package / Case="0603 (1608 Metric)", Power (Watts)=1/10W, Resistance (Ohms)=1k, Supplier Device Package=0603, Supplier Part Number 1=311-1.0KGRCT-ND, Temperature Coefficient=±100ppm/°C, Tolerance=±5%, Category=Resistors, ComponentLink1Description=http://www.yageo.com/documents/recent/PYu-RC_Group_51_RoHS_L_7.pdf, ComponentLink1URL=http://www.yageo.com/documents/recent/PYu-RC_Group_51_RoHS_L_7.pdf, Composition="Thick Film", Failure Rate=-, Features="Moisture Resistant", Height - Seated (Max)="0.022\" (0.55mm)", Packaging="Cut Tape (CT)", Part Status=Active, Pricing 1="1=0.15, 10=0.017, 100=0.0071, 1000=0.0032, 2500=0.00278 (CAD)", RoHS="RoHS Compliant", Size / Dimension="0.063\" L x 0.031\" W (1.60mm x 0.80mm)", Stock 1=4415240, Supplier 1=Digi-Key
R5: Case/Package=1206, Case Code (Metric)=3216, Manufacturer="Stackpole Electronics", Manufacturer Part Number=RMCF1206FT499K, Max Operating Temperature=155°C, Max Power Dissipation=1/8W, Min Operating Temperature=-55°C, Resistance=499k, Supplier Part Number 1=RMCF1206FT499KCT-ND, Temperature Coefficient=100ppm/°C, Tolerance=1%, Case Code (Imperial)=1206, ComponentLink1Description=https://www.seielect.com/Catalog/SEI-RMCF_RMCP.pdf, ComponentLink1URL=https://www.seielect.com/Catalog/SEI-RMCF_RMCP.pdf, ComponentLink2Description=http://components.arrow.com/part/dataview/50498553S9833735N1174, ComponentLink2URL=http://components.arrow.com/part/dataview/50498553S9833735N1174, Composition="Thick Film", Contact Plating=Tin,Matte, Height=0.028inch, Length=0.126inch, Mount="Surface Mount", Number of Terminations=2, Packaging="Tape and Reel", Pricing 1="1=0.1, 10=0.035, 100=0.0141, 1000=0.00635, 2500=0.00552 (USD)", Radiation Hardening=No, Stock 1=60246, Supplier 1=Digi-Key, Width=0.063inch
R6: library part "RES 100K OHM 1% 1/4W 1206", "100 kOhms ±1% 0.25W, 1/4W Chip Resistor 1206 (3216 Metric) Moisture Resistant Thick Film", Case/Package=1206, Case Code (Metric)=3216, Manufacturer=Yageo, Manufacturer Part Number=RC1206FR-07100KL, Max Operating Temperature=155°C, Min Operating Temperature=-55°C, Power Rating=1/8W, Resistance=100k, Supplier Part Number 1=311-100KFRCT-ND, Temperature Coefficient=100ppm/°C, Tolerance=1%, Voltage Rating=200V, Case Code (Imperial)=1206, ComponentLink1Description=https://datasheet.ciiva.com/7857/444357-7857239.pdf, ComponentLink1URL=https://datasheet.ciiva.com/7857/444357-7857239.pdf, ComponentLink2Description=https://datasheet.ciiva.com/7857/444357-7857240.pdf, ComponentLink2URL=https://datasheet.ciiva.com/7857/444357-7857240.pdf, ComponentLink3Description=https://datasheet.ciiva.com/16997/pyu-rc1206-51-rohs-l-4-16997053.pdf, ComponentLink3URL=https://datasheet.ciiva.com/16997/pyu-rc1206-51-rohs-l-4-16997053.pdf, Composition="Thick Film", Depth=1.6mm, Height=0.55mm, Lead Free="Lead Free", Length=3.1mm, Packaging="Tape and Reel", Pricing 1="1=0.1, 10=0.033, 100=0.0136, 1000=0.0061, 2500=0.00529 (USD)", REACH SVHC="No SVHC", Stock 1=1498131, Supplier 1=Digi-Key, Termination=SMD/SMT
R7: "2.49 Ohms ±1% 0.25W, 1/4W Chip Resistor 1206 (3216 Metric) Moisture Resistant Thick Film", Case/Package=1206, Case Code (Metric)=3216, Manufacturer=Yageo, Manufacturer Part Number=RC1206FR-0724R9L, Max Operating Temperature=155°C, Max Power Dissipation=250mW, Min Operating Temperature=-55°C, Package Quantity=1, Power Rating=1/8W, Resistance="2.49 Ohm", Supplier Part Number 1=311-2.49FRCT-ND, Temperature Coefficient=100ppm/°C, Tolerance=1%, Voltage Rating=200V, Case Code (Imperial)=1206, ComponentLink1Description=https://datasheet.ciiva.com/2460/pyu-rc1206-51-rohs-l-4-2460800.pdf, ComponentLink1URL=https://datasheet.ciiva.com/2460/pyu-rc1206-51-rohs-l-4-2460800.pdf, ComponentLink2Description=https://datasheet.ciiva.com/17420/pyu-rc1206-51-rohs-l-4-17420091.pdf, ComponentLink2URL=https://datasheet.ciiva.com/17420/pyu-rc1206-51-rohs-l-4-17420091.pdf, ComponentLink3Description=https://datasheet.ciiva.com/2460/pyu-rc1206-51-rohs-l-4-2460798.pdf, ComponentLink3URL=https://datasheet.ciiva.com/2460/pyu-rc1206-51-rohs-l-4-2460798.pdf, ComponentLink4Description=https://datasheet.ciiva.com/2460/pyu-rc1206-51-rohs-l-4-2460799.pdf, ComponentLink4URL=https://datasheet.ciiva.com/2460/pyu-rc1206-51-rohs-l-4-2460799.pdf, ComponentLink5Description=https://datasheet.ciiva.com/11808/0900766b80c6630a-11808511.pdf, ComponentLink5URL=https://datasheet.ciiva.com/11808/0900766b80c6630a-11808511.pdf, ComponentLink6Description=https://datasheet.ciiva.com/2460/pyu-rc1206-51-rohs-l-4-2460453.pdf, ComponentLink6URL=https://datasheet.ciiva.com/2460/pyu-rc1206-51-rohs-l-4-2460453.pdf, ComponentLink7Description=https://datasheet.ciiva.com/2460/pyu-rc1206-51-rohs-l-4-2460454.pdf, ComponentLink7URL=https://datasheet.ciiva.com/2460/pyu-rc1206-51-rohs-l-4-2460454.pdf, ComponentLink8Description=https://datasheet.ciiva.com/2460/pyu-rc1206-51-rohs-l-4-2460455.pdf, ComponentLink8URL=https://datasheet.ciiva.com/2460/pyu-rc1206-51-rohs-l-4-2460455.pdf, ComponentLink9Description=https://datasheet.ciiva.com/16768/pyu-rc1206-51-rohs-l-4-16768983.pdf, ComponentLink9URL=https://datasheet.ciiva.com/16768/pyu-rc1206-51-rohs-l-4-16768983.pdf, Composition="Thick Film", Contact Plating=Tin,Matte, Depth=1.6mm, Height=0.55mm, Lead Free="Lead Free", Length=3.1mm, Military Standard=Not, Mount="Surface Mount", Number of Terminations=2, Packaging="Tape and Reel", Pricing 1="1=0.1, 10=0.062, 100=0.0252, 1000=0.01131, 2500=0.00981 (USD)", Radiation Hardening=No, Stock 1=132816, Supplier 1=Digi-Key, Termination=SMD/SMT, Voltage Rating (DC)=200V, Weight=0.000571oz, Width=0.063inch
R8: "13.7 kOhms ±1% 0.25W, 1/4W Chip Resistor 1206 (3216 Metric) Moisture Resistant Thick Film", Case/Package=1206, Case Code (Metric)=3216, Manufacturer=Yageo, Manufacturer Part Number=RC1206FR-0713K7L, Max Operating Temperature=155°C, Min Operating Temperature=-55°C, Power Rating=1/8W, Resistance=13.7k, Supplier Part Number 1=311-13.7KFRCT-ND, Temperature Coefficient=100ppm/°C, Tolerance=1%, Voltage Rating=200V, Case Code (Imperial)=1206, ComponentLink1Description=http://components.arrow.com/part/dataview/0323_03537901, ComponentLink1URL=http://components.arrow.com/part/dataview/0323_03537901, ComponentLink2Description=http://www.yageo.com/documents/recent/PYu-RC_Group_51_RoHS_L_2.pdf, ComponentLink2URL=http://www.yageo.com/documents/recent/PYu-RC_Group_51_RoHS_L_2.pdf, ComponentLink3Description=http://www.yageo.com/documents/recent/PYu-RC1206_51_RoHS_L-4.pdf, ComponentLink3URL=http://www.yageo.com/documents/recent/PYu-RC1206_51_RoHS_L-4.pdf, ComponentLink4Description=http://www.yageo.com.tw/exep/pages/download/literatures/PYu-R_INT-thick_7.pdf, ComponentLink4URL=http://www.yageo.com.tw/exep/pages/download/literatures/PYu-R_INT-thick_7.pdf, ComponentLink5Description=http://www.mouser.com/ds/2/447/PYu-RC1206_51_RoHS_L-4-349080.pdf, ComponentLink5URL=http://www.mouser.com/ds/2/447/PYu-RC1206_51_RoHS_L-4-349080.pdf, ComponentLink6Description=http://www.yageo.com/documents/recent/PYu-RC1206_51_RoHS_L_5.pdf, ComponentLink6URL=http://www.yageo.com/documents/recent/PYu-RC1206_51_RoHS_L_5.pdf, Composition="Thick Film", Contact Plating=Tin,Matte, Depth=1.6mm, Height=0.55mm, Lead Free="Lead Free", Length=3.1mm, Military Standard=Not, Packaging="Tape and Reel", Pricing 1="1=0.1, 10=0.033, 100=0.0136, 1000=0.0061, 2500=0.00529 (USD)", Radiation Hardening=No, Stock 1=44928, Supplier 1=Digi-Key, Termination=SMD/SMT, Voltage Rating (DC)=200V, Width=1.6mm
R9 R10: "RES SMD 10K OHM 1% 1/10W 0603", Manufacturer 1=Yageo, Manufacturer Part Number 1=RC0603FR-0710KL, Operating Temperature="-55°C ~ 155°C", Package / Case="0603 (1608 Metric)", Power=1/10W, Resistance=10k, Supplier Device Package=0603, Supplier Part Number 1=311-10.0KHRCT-ND, Temperature Coefficient=±100ppm/°C, Tolerance=±1%, ComponentLink1Description=http://www.yageo.com/documents/recent/PYu-RC_Group_51_RoHS_L_7.pdf, ComponentLink1URL=http://www.yageo.com/documents/recent/PYu-RC_Group_51_RoHS_L_7.pdf, Composition="Thick Film", Failure Rate=-, Height - Seated (Max)="0.022\" (0.55mm)", Packaging="Cut Tape (CT)", Part Status=Active, Size / Dimension="0.063\" L x 0.031\" W (1.60mm x 0.80mm)", Supplier 1=Digi-Key
U1 U5: "General Purpose Amplifier 1 Circuit Rail-to-Rail SOT-23-5", Current - Output / Channel=50mA, Current - Supply=400µA, Manufacturer 1="Texas Instruments", Manufacturer Part Number 1=TLV316QDBVRQ1, Operating Temperature="-40°C ~ 125°C", Package / Case="SC-74A, SOT-753", Supplier Device Package=SOT-23-5, Supplier Part Number 1=296-45323-1-ND, Voltage - Supply, Single/Dual (±)="1.8 V ~ 5.5 V, ±0.9 V ~ 2.75 V", -3db Bandwidth=-, Amplifier Type="General Purpose", Category="Integrated Circuits (ICs)", ComponentLink1Description=http://www.ti.com/lit/ds/symlink/tlv316-q1.pdf, ComponentLink1URL=http://www.ti.com/lit/ds/symlink/tlv316-q1.pdf, Description 1="IC OP AMP GP RR 10MHZ 5-SOT-23", Mounting Type="Surface Mount", Number of Circuits=1, Output Type=Rail-to-Rail, Packaging="Cut Tape (CT)", Part Status=Active, Pricing 1="1=1.33, 10=1.185, 100=0.9234, 500=0.76276, 1000=0.60218 (CAD)", RoHS="RoHS Compliant", Slew Rate="6 V/µs", Stock 1=1747, Supplier 1=Digi-Key
U2: "Real Time Clock (RTC) IC Clock/Calendar I²C, 2-Wire Serial 8-SOIC (0.154\", 3.90mm Width)", Case/Package=SO, Manufacturer="NXP Semiconductors", Manufacturer Part Number=PCF8523T/1,118, Max Operating Temperature=85°C, Max Supply Voltage=5.5V, Min Operating Temperature=-40°C, Min Supply Voltage=1.2V, Package Quantity=2500, Supplier Part Number 1=568-5306-1-ND, ComponentLink1Description=https://datasheet.ciiva.com/15152/getdatasheetpartid-445247-15152839.pdf, ComponentLink1URL=https://datasheet.ciiva.com/15152/getdatasheetpartid-445247-15152839.pdf, ComponentLink2Description=https://datasheet.ciiva.com/1238/pcf8523-1238780.pdf, ComponentLink2URL=https://datasheet.ciiva.com/1238/pcf8523-1238780.pdf, ComponentLink3Description=https://datasheet.ciiva.com/1238/pcf8523-1238781.pdf, ComponentLink3URL=https://datasheet.ciiva.com/1238/pcf8523-1238781.pdf, ComponentLink4Description=https://datasheet.ciiva.com/16286/pcf8523-16286477.pdf, ComponentLink4URL=https://datasheet.ciiva.com/16286/pcf8523-16286477.pdf, ComponentLink5Description=https://datasheet.ciiva.com/1238/pcf8523-1238782.pdf, ComponentLink5URL=https://datasheet.ciiva.com/1238/pcf8523-1238782.pdf, Contact Plating=Gold, Interface=I2C, Lead Free="Lead Free", Logic Function=Clock, Mount="Surface Mount", Number of Pins=8, Packaging="Tape and Reel", Pricing 1="1=1.3, 10=1.16, 100=0.9045, 500=0.74718, 1000=0.58988 (USD)", Radiation Hardening=No, REACH SVHC="No SVHC", Stock 1=18252, Supplier 1=Digi-Key, Time Format=HH:MM:SS
U3: "Buck Switching Regulator IC Positive Adjustable 0.596V 1 Output 2A SOT-23-6 Thin, TSOT-23-6", Case/Package=SOT-6, Manufacturer="Texas Instruments", Manufacturer Part Number=TPS54202HDDCT, Max Input Voltage=28V, Max Operating Temperature=125°C, Max Output Voltage=26V, Min Input Voltage=4.5V, Min Operating Temperature=-40°C, Min Output Voltage=600mV, Output Current=2A, Quiescent Current=40uA, Supplier Part Number 1=296-44497-1-ND, Switching Frequency=500kHz, ComponentLink1Description=http://www.ti.com/lit/ds/symlink/tps54202h.pdf, ComponentLink1URL=http://www.ti.com/lit/ds/symlink/tps54202h.pdf, ComponentLink2Description=http://www.ti.com/general/docs/lit/getliterature.tsp?genericPartNumber=TPS54202H&amp;&amp;fileType=pdf, ComponentLink2URL=http://www.ti.com/general/docs/lit/getliterature.tsp?genericPartNumber=TPS54202H&amp;&amp;fileType=pdf, ComponentLink3Description=http://www.ti.com/general/docs/lit/getliterature.tsp?genericPartNumber=TPS54202H&&fileType=pdf, ComponentLink3URL=http://www.ti.com/general/docs/lit/getliterature.tsp?genericPartNumber=TPS54202H&&fileType=pdf, Lead Free="Lead Free", Number of Outputs=1, Number of Pins=6, Output Voltage=26V, Packaging="Cut Tape", Pricing 1="1=2, 10=1.796, 100=1.4436 (USD)", REACH SVHC="No SVHC", Stock 1=2574, Supplier 1=Digi-Key
U4: Current - Limit (Min)=250mA, Current - Output=200mA, Manufacturer="Microchip Technology", Manufacturer Part Number=MIC94310-PYMT-TR, Operating Temperature="-40°C ~ 125°C", Package / Case="4-UFDFN Exposed Pad", Supplier Device Package="4-TDFN (1.2x1.6)", Supplier Part Number 1=576-4761-1-ND, Voltage - Dropout (Typical)="0.04V @ 200mA", Voltage - Input="Up to 3.6V", Voltage - Output=3V, Category="Integrated Circuits (ICs)", ComponentLink1Description=http://www.microchip.com/mymicrochip/filehandler.aspx?ddocname=en580409, ComponentLink1URL=http://www.microchip.com/mymicrochip/filehandler.aspx?ddocname=en580409, Mounting Type="Surface Mount", Packaging="Cut Tape (CT)", Part Status=Active, Pricing 1="1=0.45, 25=0.3708, 100=0.3386 (CAD)", Regulator Topology="Positive Fixed", RoHS="RoHS Compliant", Stock 1=4802, Supplier 1=Digi-Key
Y1: "32.768kHz ±20ppm Crystal 12.5pF 50 kOhms 4-SOJ, 5.50mm pitch", ESR (Equivalent Series Resistance)=50kR, Frequency=32.768kHz, Frequency Tolerance=20ppm, Load Capacitance=12.5pF, Manufacturer="ECS International", Manufacturer Part Number=ECS-.327-12.5-17X-TR, Max Operating Temperature=85°C, Min Operating Temperature=-40°C, Package Quantity=1, Supplier Part Number 1=XC1195CT-ND, ComponentLink1Description=https://datasheet.ciiva.com/852/ecx-306x-852775.pdf, ComponentLink1URL=https://datasheet.ciiva.com/852/ecx-306x-852775.pdf, ComponentLink2Description=https://datasheet.ciiva.com/852/ecx-306x-852776.pdf, ComponentLink2URL=https://datasheet.ciiva.com/852/ecx-306x-852776.pdf, ComponentLink3Description=https://datasheet.ciiva.com/852/ecx-306x-852777.pdf, ComponentLink3URL=https://datasheet.ciiva.com/852/ecx-306x-852777.pdf, Height=0.098inch, Lead Free="Lead Free", Length=0.315inch, Mount="Surface Mount", Packaging="Tape and Reel", Pricing 1="1=0.56, 10=0.468, 50=0.4208, 100=0.374, 500=0.3553, 1000=0.2992 (USD)", Stock 1=67622, Supplier 1=Digi-Key, Termination=SMD/SMT, Tolerance=20ppm, Width=0.15inch

## Nets (pads, with @x,y where several pads share a name; then routed paths per layer and width w, separated by ;. In a path a pad name is that pad's centre, name@x,y a point inside that pad or via, vN(x,y) a via of type N, cw(c..) or ccw(c..) an arc to the next point about the centre after c; other vN are vias at no path point)
3V0: C11.1 R4.1 U1.5 U4.1 U5.5
3V3: C10.1 P2.40 P2.41 P2.42 P2.43 P2.44 P2.45 U4.3 U4.4
+5V: C7.1 L1.2 P5.2 P5.5 R6.1 R7.1 R9.1
+12V: C9.1 P2.47 P2.48 P2.49 P2.50 P3.1 P4.1 P6.1 R5.2 U3.3
GND: BT1.2 C2.2 C4.2 C5.2 C9.2 C10.2 C11.2 P2.1 P2.2 P2.3 P2.4 P2.26 P2.27 P2.28 P2.29 P3.2 P4.2 P5.6 P5.9 P5.14 P5.20 P5.25 P5.30 P5.34 P5.39 P6.2 P7.9 R2.1 R7.2 R8.2 R10.2 U1.2 U2.4 U3.1 U4.2 U4.5 U5.2
IN-: P1.1
NetBT1_1: BT1.1 BT1.3 U2.3
NetC1_1: C1.1 C3.2 R3.1 U1.1
NetC1_2: C1.2 R1.1
NetC2_1: C2.1 P1.2 R2.2 U1.3
NetC3_1: C3.1 R3.3 U1.4
NetC4_1: C4.1 C5.1 R4.2 U2.8
NetC6_1: C6.1 U3.2
NetC6_2: C6.2 L1.1 U3.6
NetC7_2: C7.2 R6.2 R8.1 U3.4
NetP5_27: P5.27
NetP5_28: P5.28
NetR5_1: R5.1 U3.5
NetR9_2: R9.2 R10.1 U5.3
NetU2_1: U2.1 Y1.1
NetU2_2: U2.2 Y1.4
NetU2_5: U2.5
NetU2_6: U2.6
PA0/AN0: P2.25 R1.2
PA1/AN1: P2.24 U5.1 U5.4
PA2/AN2/USART2_TX: P2.23
PA3/AN3/USART2_RX: P2.22
PA4/AN4/SPI1_NSS: P2.21
PA5/AN5/SPI1_SCK: P2.20
PA6/AN6/SPI1_MISO: P2.19
PA7/AN7/SPI1_MOSI: P2.18
PA8: P2.7
PA9: P2.6
PA10: P2.5
PA15/LED_RED: P2.39
PB0/AN8: P2.17
PB1/AN9: P2.16
PB2: P2.15
PB3/LED_GREEN: P2.38
PB4/LED_BLUE: P2.37
PB5/LED_BLUE: P2.36
PB6/USART1_TX: P2.34
PB7/USART1_RX: P2.33
PB8/I2C1_SCL: P2.32
PB9/I2C1_SDA: P2.31
PB10/USART3_TX/I2C2_SCL: P2.14
PB11/USART3_RX/I2C2_SDA: P2.13
PB12/SPI2_NSS: P2.11
PB13/SPI2_SCK: P2.10
PB14/SPI2_MISO: P2.9
PB15/SPI2_MOSI: P2.8
PC13: P2.30
pads on no net: P1.3 P2. P2.12 P2.35 P2.46 P3. P4. P5.1 P5.3 P5.4 P5.7 P5.8 P5.10 P5.11 P5.12 P5.13 P5.15 P5.16 P5.17 P5.18 P5.19 P5.21 P5.22 P5.23 P5.24 P5.26 P5.29 P5.31 P5.32 P5.33 P5.35 P5.36 P5.37 P5.38 P5.40 P6. P7.1 P7.2 P7.3 P7.4 P7.5 P7.6 P7.7 P7.8 P7.10 R3.2 U2.7 Y1.2 Y1.3